# Altium PCB PJ1301-001-A1.PcbDoc (part 4 of 4)
Units mm, origin at the board's own origin, x right, y up, seen from the top; angles counter-clockwise.
Board outline 163.83 x 187.81 mm, 4 copper layers (Top Layer, GND, POWER, Bottom Layer); 436 components, 348 nets, 1620 pads, 1368 vias.
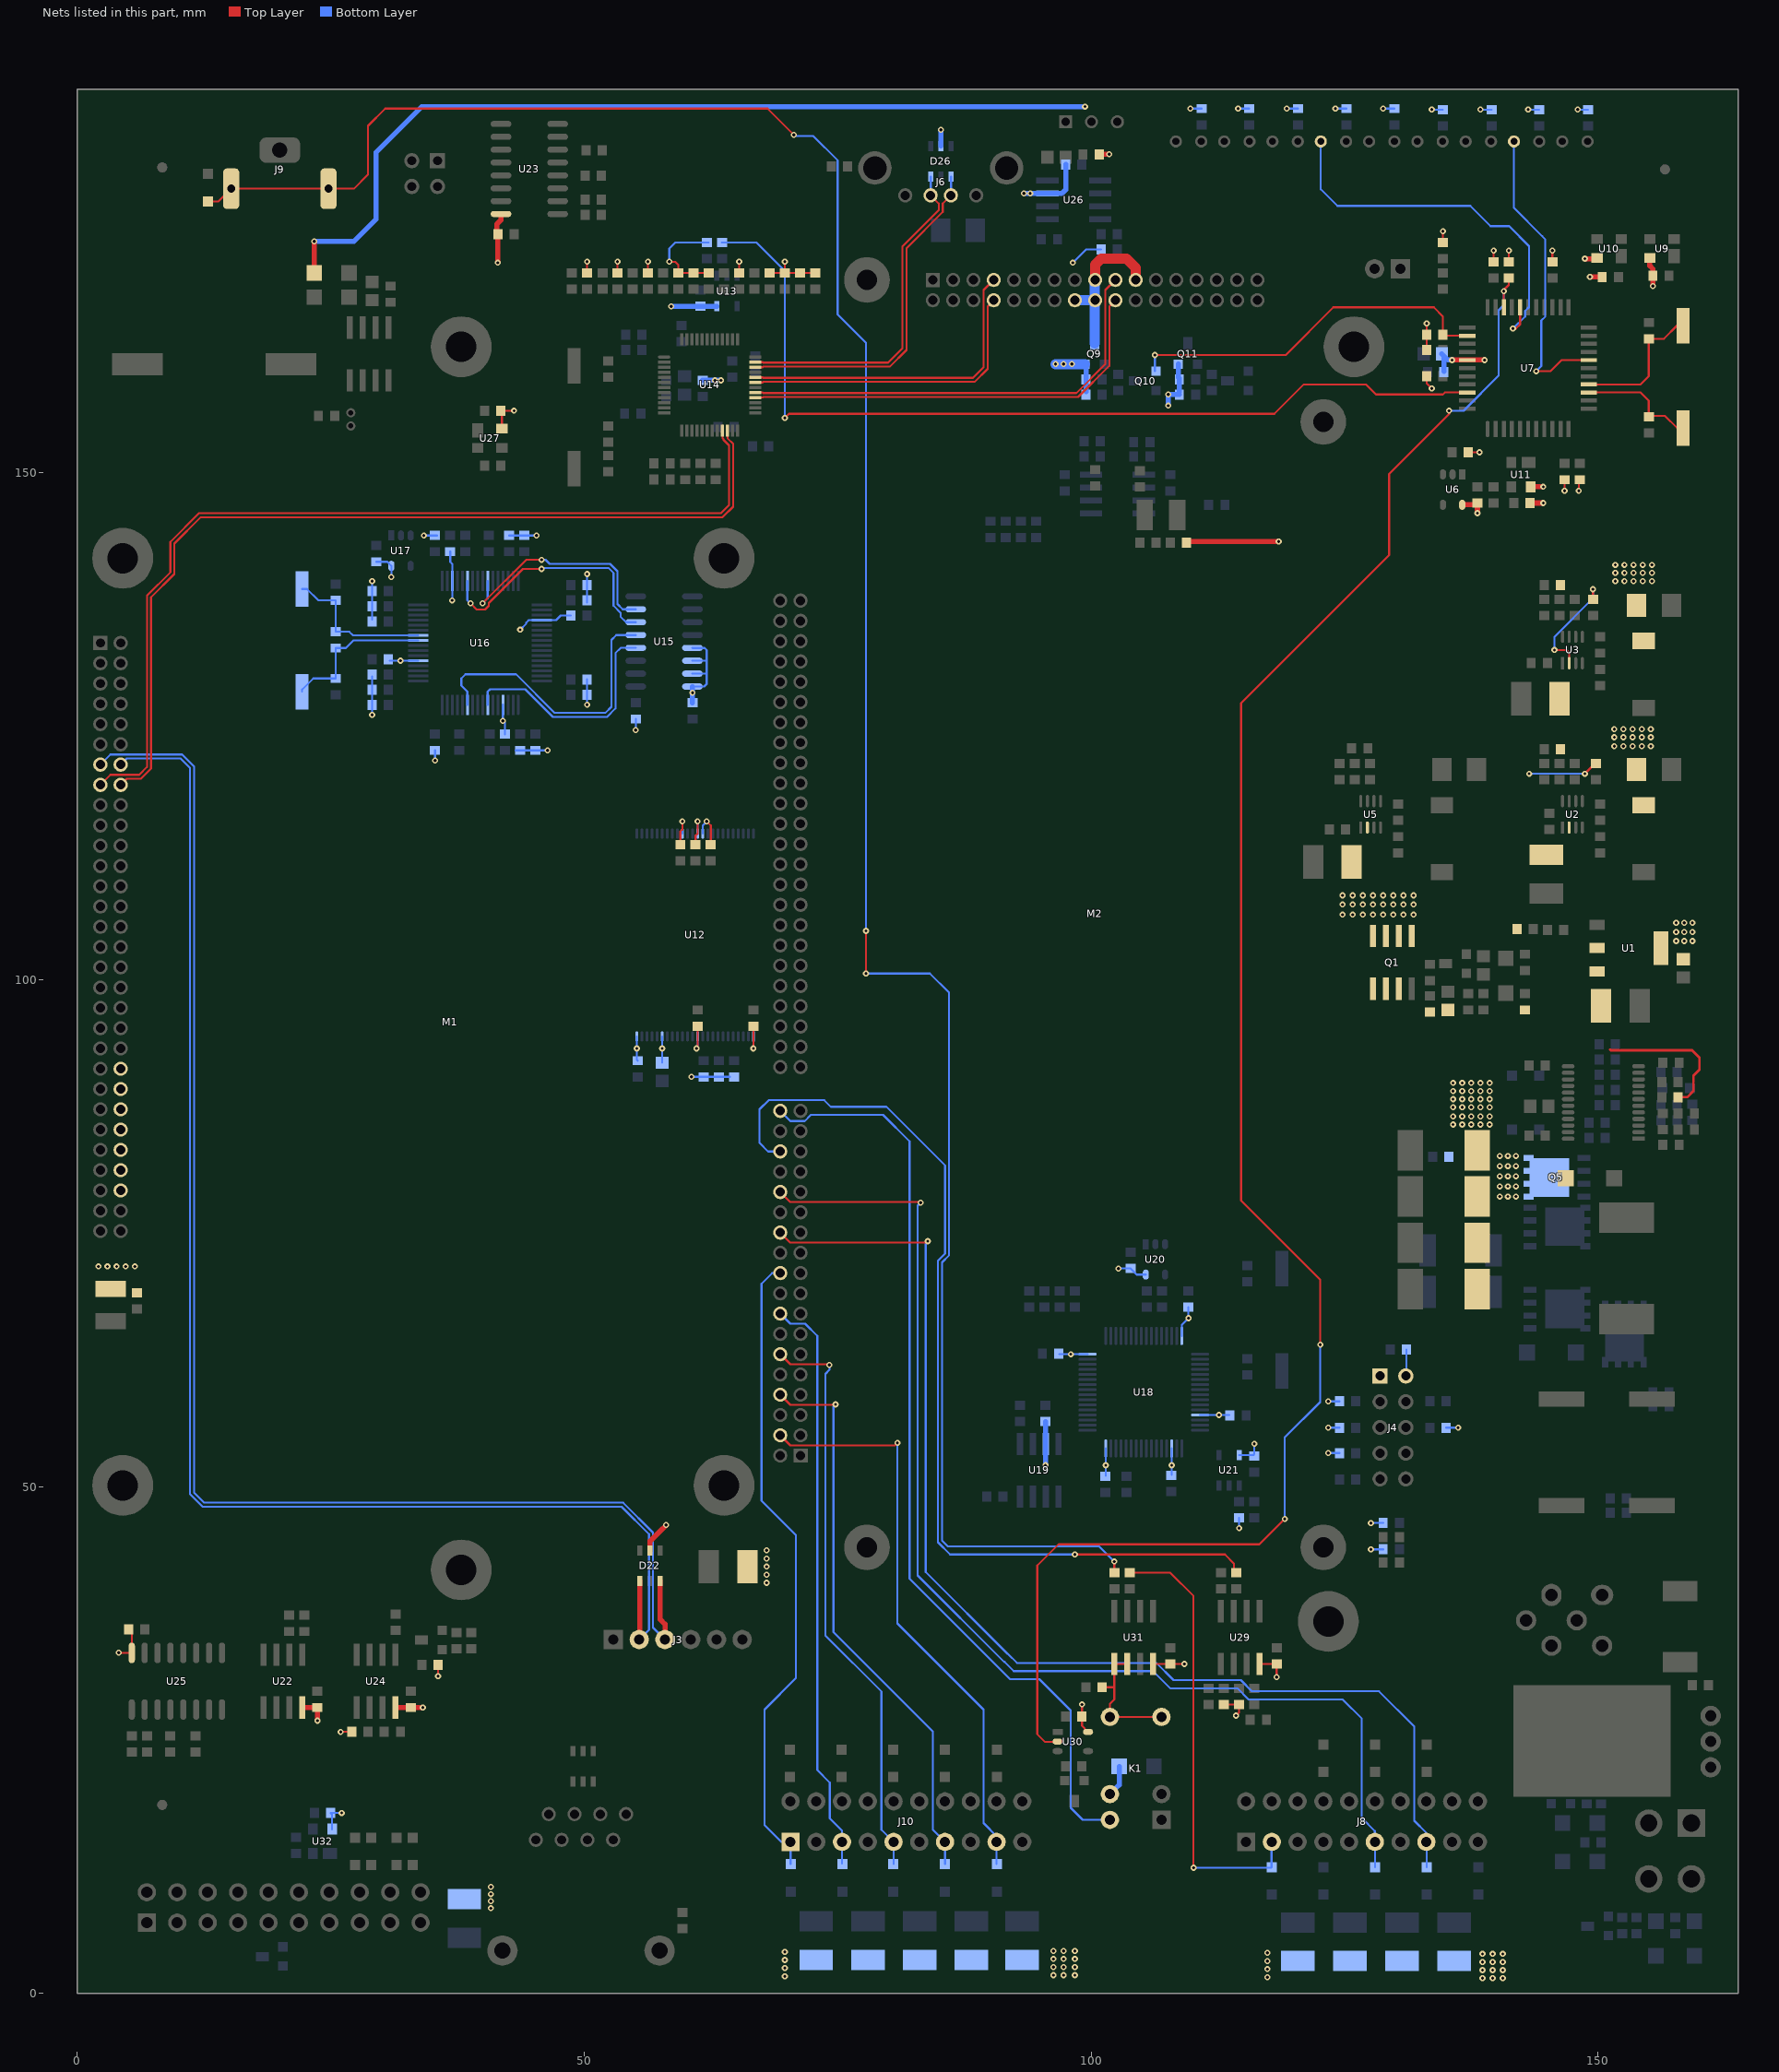
[diagram p6: the nets of this part, all layers, seen from the top]

## Via types
v1: diameter 0.6, hole 0.3, Top Layer to Bottom Layer, tented both sides, 1367 vias
v2: diameter 0.6, hole 0.3, Top Layer to Bottom Layer, 1 vias

## Nets (pads, with @x,y where several pads share a name; then routed paths per layer and width w, separated by ;. In a path a pad name is that pad's centre, name@x,y a point inside that pad or via, vN(x,y) a via of type N, cw(c..) or ccw(c..) an arc to the next point about the centre after c; other vN are vias at no path point) (continued)
UARTA-CS: U15.4 U16.7 | length 23.2
  Bottom Layer w0.2: U16.7@40.5,127.1 40.5,128.4 40.734,128.634 44.2,128.634 46.934,125.9 52.266,125.9 53.1,126.734 53.1,132.2 53.61,132.71 U15.4@55.1,132.71
UARTB-CS: U15.5 U16.11 | length 28.8
  Bottom Layer w0.2: U16.11@38.5,127.1 38.5,128.4 37.9,129 37.9,129.7 38.3,130.1 43.3,130.1 47.1,126.3 52.1,126.3 52.7,126.9 52.7,133.5 53.18,133.98 U15.5@55.1,133.98
UARTC-CS: U15.6 U16.38 | length 25.1
  Top Layer w0.2: v1(38.8,137.1) 39.4,136.5 40.249,136.5 40.6,136.851 40.6,137.134 43.966,140.5 v1(45.8,140.5)
  Bottom Layer w0.2: U16.38@38.5,139.3 38.5,137.4 v1(38.8,137.1) ; v1(45.8,140.5) 45.9,140.6 52.4,140.6 52.9,140.1 52.9,136.874 53.6,136.174 53.6,135.8 54.15,135.25 U15.6@55.1,135.25
UARTD-CS: U15.7 U16.42 | length 23.2
  Top Layer w0.2: v1(40,137.1) 44.3,141.4 v1(45.8,141.4)
  Bottom Layer w0.2: v1(40,137.1) 40.5,137.6 U16.42@40.5,139.3 ; v1(45.8,141.4) 46.2,141.4 46.6,141 52.566,141 53.3,140.266 53.3,137.04 53.82,136.52 U15.7@55.1,136.52
USB0_N: M1.A15 U14.21 | length 92.7
  Top Layer w0.2: M1.A15@2.3,119.2 3.3,120.2 6.134,120.2 6.9,120.966 6.9,137.866 9.2,140.166 9.2,143.166 12.034,146 63.5,146 64.3,146.8 64.3,152.676 63.75,153.226 63.75,153.291 63.65,153.391 U14.21@63.65,154.15
USB0_P: M1.A16 U14.22 | length 91.2
  Top Layer w0.2: M1.A16@4.3,119.2 4.9,119.8 6.3,119.8 7.3,120.8 7.3,137.7 9.6,140 9.6,143 12.2,145.6 63.666,145.6 64.7,146.634 64.7,152.841 64.15,153.391 U14.22@64.15,154.15
USB1_N: D22.3 J3.3 M1.A13 | length 145.7
  Top Layer w0.5: D22.3@57.5,40.7 57.5,36.9 57.98,36.42 J3.3@57.98,34.9
  Bottom Layer w0.2: M1.A13@2.3,121.2 3.3,122.2 10.366,122.2 11.55,121.016 11.55,49.4 12.55,48.4 53.866,48.4 56.8,45.466 56.8,36.08 J3.3@57.98,34.9
USB1_P: D22.1 J3.2 M1.A14 | length 142.5
  Top Layer w0.5: J3.2@55.5,34.96 D22.1@55.5,40.7
  Bottom Layer w0.2: M1.A14@4.3,121.2 4.9,121.8 10.2,121.8 11.15,120.85 11.15,49.4 11.15,49.234 12.384,48 53.7,48 56.4,45.3 56.4,35.86 J3.2@55.44,34.9
USB2_N: M2.20 U14.28 | length 42.9
  Top Layer w0.2: U14.28@66.9,157.4 67.63,157.4 67.68,157.45 98.716,157.45 101.8,160.534 101.8,166.4 M2.20@102.4,167
USB2_P: M2.19 U14.29 | length 44.4
  Top Layer w0.2: U14.29@66.9,157.9 67.63,157.9 67.68,157.85 98.55,157.85 101.4,160.7 101.4,168 M2.19@102.4,169
USB3_N: M2.8 U14.31 | length 30.5
  Top Layer w0.2: U14.31@66.9,158.9 67.63,158.9 67.68,158.95 88.516,158.95 89.8,160.234 89.8,166.4 M2.8@90.4,167
USB3_P: M2.7 U14.32 | length 32
  Top Layer w0.2: U14.32@66.9,159.4 67.63,159.4 67.68,159.35 88.35,159.35 89.4,160.4 89.4,168 M2.7@90.4,169
USB4_N: D26.1 J6.2 U14.34 | length 34.5
  Top Layer w0.2: U14.34@66.9,160.4 67.63,160.4 67.68,160.45 80.15,160.45 81.8,162.1 81.8,172.134 85.379,175.713 85.379,176.545 J6.2@86.179,177.345
  Bottom Layer w0.2: J6.2@86.2,177.366 D26.1@86.2,179.2
USB4_P: D26.3 J6.3 U14.35 | length 33.8
  Top Layer w0.2: U14.35@66.9,160.9 67.63,160.9 67.68,160.85 79.984,160.85 81.4,162.266 81.4,172.3 84.979,175.879 84.979,176.545 J6.3@84.179,177.345
  Bottom Layer w0.2: J6.3@84.2,177.366 D26.3@84.2,179.2
USBHUB-RST: R68.1 U7.42 | length 91
  Top Layer w0.2: v1(69.8,155.4) 70.2,155.8 118.069,155.8 120.969,158.7 127.1,158.7 128.1,157.7 134.7,157.7 134.9,157.9 U7.42@137.1,157.9
  Bottom Layer w0.2: R68.1@63.6,172.7 67,172.7 69.8,169.9 v1(69.8,155.4)
V3.3: C16.1 C57.2 C58.2 C59.2 C60.2 C61.2 C62.2 C63.2 C78.1 C79.1 C80.2 C81.2 C82.2 C83.2 C84.1 C87.1 C88.1 C89.1 C91.2 C92.2 C93.2 C94.2 C95.2 C96.2 C97.1 C101.1 C107.1 C112.2 C122.1 C123.2 C124.1 C125.1 J4.1 J4.2 L1.2 L5.2 Q9.2 Q11.2 R14.1 R53.2 R54.2 R55.2 R56.1 R63.2 R64.2 R67.1 R69.2 R70.2 R71.2 R72.2 R73.2 R74.2 R75.2 R76.2 R77.2 R78.2 R79.2 R80.2 R81.2 R82.2 R83.2 R84.2 R85.2 R86.2 R91.2 R92.2 R93.2 R95.2 R98.2 R101.1 R102.1 R110.2 R111.2 R112.2 R113.2 R119.1 R129.2 R130.2 R152.2 R153.2 R154.2 R155.2 R158.2 U12.1 U12.12 U12.19 U12.24 U12.34 U12.37 U12.38 U13.5 U15.13 U15.14 U15.15 U15.16 U16.4 U16.21 U16.35 U16.52 U17.5 U18.13 U18.19 U18.32 U18.48 U18.64 U20.5 U21.5 U23.16 U25.16 U27.4 U29.4 U30.5 U31.4 U32.4 | length 174.9
  Top Layer w0.2: v1(4.1,33.6) 4.112,33.588 U25.16@5.4,33.588 5.4,35.6 C107.1@5.1,35.9 ; U27.4@41.9,154.35 C112.2@41.9,156 ; C112.2@41.9,156.1 v1(43.1,156.1) ; R152.2@50.3,169.7 v1(50.3,170.8) ; R153.2@53.3,169.7 v1(53.3,170.8) ; R154.2@56.3,169.7 v1(56.3,170.8) ; v1@58.388,170.788 59.012,170.788 59.3,170.5 R155.2@59.3,169.7 R72.2@62.3,169.7 ; C58.2@59.5,113.3 59.5,114.6 59.7,114.8 v1(59.7,115.6) ; C59.2@61,113.3 61,114.2 61.2,114.4 v1(61.2,115.6) ; v1(61.1,93.2) 61.2,93.3 C62.2@61.2,95.4 ; v1(62.1,115.6) 62.5,115.2 C60.2@62.5,113.3 ; R71.2@65.3,169.7 v1(65.3,170.8) ; v1(66.7,93.2) C63.2@66.7,95.4 ; R70.2@68.3,169.7 R64.2@69.8,169.7 ; v1(69.8,170.8) R64.2@69.8,169.7 ; R63.2@72.8,169.7 R69.2@71.3,169.7 R64.2@69.8,169.7 ; v1(99.1,28.5) C123.2@99.1,27.3 99.1,26.4 U30.5@99.7,25.8 ; U31.4@106.105,32.5 v1(109.2,32.5) ; R130.2@113.1,28.5 R129.2@114.5,28.5 ; v1(114.3,27.4) 114.6,27.7 R129.2@114.6,28.5 ; U29.4@116.605,32.5 C122.1@118.3,32.5 v1(118.3,31.2)
  Top Layer w0.5: v1(41.5,170.7) C101.1@41.5,173.5 41.4,173.6 41.4,174.5 41.812,174.912 U23.16@41.812,175.5
  Bottom Layer w0.2: U32.4@25.15,16.2 25.15,17.65 C125.1@25,17.8 v1(26.1,17.8) ; v1(29.1,126.1) R80.2@29.1,128.6 R81.2@29.1,129.9 ; R85.2@29.1,135.5 R84.2@29.1,136.8 v1(29.1,139.3) ; C84.1@29.5,141.2 30.6,141.2 U17.5@31,140.8 v1(31,139.7) ; C80.2@30.85,131.45 U16.21@33.65,131.45 ; v1@34.4,143.8 R82.2@35.5,143.8 ; v1(35.3,121.6) R78.2@35.3,122.6 ; C83.2@36.8,142.2 36.8,141.2 37,141 U16.35@37,139.3 v1(37,137.4) ; U16.4@42,127.1 v1(42,125.5) 42.2,125.3 C81.2@42.2,124.2 ; R86.2@42.6,143.8 v1(45.3,143.8) ; R74.2@43.233,122.6 45.8,122.6 v1(46.4,122.6) ; v1(43.7,134.5) 44.3,135.1 44.3,135.2 44.55,135.45 U16.52@45.85,135.45 47.25,135.45 47.7,135.9 C82.2@48.7,135.9 ; v1(50.3,127.1) R77.2@50.3,129.6 ; R93.2@50.3,137.2 50.3,138.5 v1@50.3,139.8 ; v1(55.1,124.6) R73.2@55.1,125.7 ; U12.24@55.2,94.4 v1(55.2,93.2) 55.2,92.1 C61.2@55.3,92 ; C57.2@57.7,91.8 U12.19@57.7,94.4 ; v1(58.4,170.8) 58.4,172.1 59,172.7 R67.1@62.3,172.7 ; U12.34@59.7,114.4 v1(59.7,115.6) ; v1(60.6,90.4) R53.2@61.8,90.4 R55.2@64.4,90.4 ; U15.16@60.688,128.9 61.84,128.9 62.07,129.13 ; U15.15@60.688,130.17 62.07,130.17 62.1,130.2 ; U15.14@60.688,131.44 62.06,131.44 ; U15.13@60.688,132.71 60.698,132.7 61.9,132.7 62.1,132.5 62.1,130.2 ; v1(61.1,93.2) 61.2,93.3 U12.12@61.2,94.4 ; U12.37@61.2,114.4 v1(61.2,115.6) ; U12.38@61.7,114.4 61.7,115.2 v1(62.1,115.6) ; 62.1,129.16 62.1,130.2 ; v1(66.7,93.2) U12.1@66.7,94.4 ; C95.2@96.85,63.05 U18.48@99.65,63.05 ; v1(98.2,170.7) 99.5,172 R158.2@101,172 ; C94.2@101.45,51.05 U18.32@101.45,53.75 ; v1(102.7,71.5) C89.1@103.9,71.5 104.5,70.9 U20.5@105.4,70.9 ; C93.2@107.95,51.15 U18.19@107.95,53.75 ; U18.64@108.95,64.85 108.95,65.95 v1(109.6,66.6) C96.2@109.6,67.7 ; U18.13@110.75,57.05 C92.2@113.65,57.05 ; v1(114.6,45.9) R119.1@114.6,46.9 ; U21.5@114.6,53.1 116,53.1 116.1,53.2 v1(116.1,54.2) ; v1(123.4,53.3) R112.2@124.5,53.3 ; v1(123.4,55.8) R111.2@124.5,55.8 ; v1(123.4,58.4) R110.2@124.5,58.4 ; v1(127.6,43.8) R102.1@128.8,43.8 ; v1(127.6,46.4) R101.1@128.8,46.4 ; J4.2@131.1,60.96 C91.2@131.1,63.5 ; R113.2@135,55.8 v1(136.2,55.8)
  Bottom Layer w0.5: v1(58.6,166.4) C78.1@61.5,166.4 U13.5@63.1,166.4 ; U15.16@60.688,128.9 60.7,128.888 v1(60.7,128.3) C79.1@60.7,127.3 ; L5.2@61.7,159.1 v1(63.5,159.1) ; Q9.2@99.4,160.7 99.5,160.6 C87.1@99.5,158 ; v1(107.6,156.6) v1(107.6,157.7) C88.1@108.7,157.7 ; Q11.2@108.595,160.7 108.595,159.405 108.7,159.3 R98.2@108.7,159.2 C88.1@108.7,158
  Bottom Layer w1: v1(96.5,160.7) Q9.2@99.4,160.7
  other v1: 101.45,52.1 107.95,52.1 112.6,57.05 98,63.05 57.7,93.2 151.6,123 152.5,123 153.4,123 154.3,123 155.2,123 151.6,123.9 152.5,123.9 153.4,123.9 154.3,123.9 155.2,123.9 151.6,124.7 152.5,124.7 153.4,124.7 154.3,124.7 155.2,124.7 31.9,131.45 50.3,140 34.2,143.8 62.9,159.1 97.3,160.7 98.1,160.7
V3.3-MCU: C10.2 C44.1 C47.2 C48.2 C49.2 C50.2 C51.2 D27.2 R4.1 R39.1 R40.1 R41.1 R42.1 R43.1 R44.1 R45.1 R46.1 R47.1 R48.1 R49.1 R50.1 R51.1 R52.1 R97.2 R100.2 R106.1 R134.1 R139.1 U1.2 U1.4 U6.5 U7.38 U9.4 U10.4 U11.4 | length 127.2
  Top Layer w0.2: R139.1@133.1,159.5 133.1,158.8 v1(133.6,158.3) ; R100.2@133.1,162.2 R97.2@133.1,163.6 v1(133.1,164.7) ; R51.1@134.7,172.7 v1(134.7,173.8) ; R39.1@137.2,152 v1(138.3,152) ; R106.1@139.7,170.8 v1(139.7,171.9) ; R134.1@141.2,170.8 v1(141.2,171.9) ; R49.1@145.5,170.8 v1(145.5,171.9) ; v1(146.7,148.2) R50.1@146.7,149.3 ; v1(148.1,148.2) R4.1@148.1,149.3
  Top Layer w0.5: D27.2@23.4,169.5 v1(23.4,172.8) ; R52.1@100.7,181.4 v1(101.8,181.4) ; v1(135.6,161.1) U7.38@137.1,161.1 v1(138.8,161.1) ; v1(148.7,171.1) U10.4@149.85,171.1 ; v1(149.2,169.3) C50.2@150.4,169.3 ; U9.4@155.1,171.15 155.1,170.4 155.4,170.1 C48.2@155.4,169.4 v1(155.4,168.4)
  Top Layer w0.508: U6.5@136.6,146.827 C44.1@137.927,146.827 ; v1(138.1,146) C44.1@138.1,147 ; C51.2@143.3,147 v1(144.6,147) ; U11.4@143.35,148.6 v1(144.6,148.6)
  Bottom Layer w0.2: v1(109.8,185.9) R45.1@110.9,185.9 ; v1(114.5,185.9) R44.1@115.6,185.9 ; v1(119.3,185.9) R47.1@120.4,185.9 ; v1(124.1,185.9) R48.1@125.2,185.9 ; v1(128.8,185.9) R43.1@129.9,185.9 ; v1(133.6,185.8) R42.1@134.7,185.8 ; v1(138.4,185.8) R41.1@139.5,185.8 ; v1(143.1,185.8) R40.1@144.2,185.8 ; v1(148,185.8) R46.1@149,185.8
  Bottom Layer w0.5: v1(23.4,172.8) 27.3,172.8 29.5,175 29.5,181.6 34,186.1 v1(99.4,186.1) ; C49.2@134.6,161.7 C49.2@134.8,161.5 ; C47.2@134.8,160 C49.2@134.8,161.5 ; v1(135.6,161.1) 135.2,161.1 C49.2@134.8,161.5
  other v1: 157.7,103.8 158.5,103.8 159.3,103.8 157.7,104.7 158.5,104.7 159.3,104.7 157.7,105.6 158.5,105.6 159.3,105.6
V5: C26.1 C55.2 C56.2 C90.2 C100.2 C106.1 C113.1 D22.5 D26.5 D40.1 F2.2 K1.9 L2.2 M1.A44 M1.A46 M1.A48 M1.A50 M1.A52 M1.A54 M1.A56 R20.1 R123.1 R126.2 R140.2 U19.3 U22.8 U24.8 U26.7 | length 35.9
  Top Layer w0.2: v1(26,25.8) R126.2@27.1,25.8 ; v1(35.6,31.3) R123.1@35.6,32.4
  Top Layer w0.5: U22.8@22.205,28.2 C100.2@23.7,28.2 v1(23.7,26.9) ; U24.8@31.405,28.2 v1(34.1,28.2) ; D22.5@56.5,43.7 56.5,44.6 57.5,45.6 v1(58.1,46.2) ; R140.2@109.3,143.2 v1(118.5,143.2)
  Bottom Layer w0.5: D26.5@85.2,182.2 v1(85.2,183.8) ; v1(93.365,177.535) U26.7@95.7,177.535 97.135,177.535 97.5,177.9 C113.1@97.5,180.4 ; v1(95.5,52.1) C90.2@95.5,56.4 ; K1.9@101.86,19.66 102.771,20.571 D40.1@102.771,22.4
  other v1: 68,40.5 68,41.3 68,42.1 68,42.9 68,43.7 2.1,71.7 3,71.7 3.9,71.7 4.8,71.7 5.7,71.7 151.7,139.3 152.6,139.3 153.5,139.3 154.4,139.3 155.3,139.3 151.7,140.1 152.6,140.1 153.5,140.1 154.4,140.1 155.3,140.1 151.7,140.9 152.6,140.9 153.5,140.9 154.4,140.9 155.3,140.9 94,177.535
V12: C15.2 C25.2 C37.2 F3.1 F4.1 F5.1 F6.1 F7.1 F9.1 F10.1 F11.1 F12.1 F13.1 Q1.5 Q1.6 Q1.7 Q1.8 R2.2 R12.2 R18.2 U2.2 U3.2 U5.2 | length 18.1
  Top Layer w0.2: v1(145.7,132.5) 146.9,132.5 147.15,132.25 U3.2@147.15,131.2 ; v1@148.6,120.3 v1(148.7,120.3) R12.2@149.7,121.3 ; R18.2@149.5,137.5 v1(149.5,138.5)
  Bottom Layer w0.2: v2(143.2,120.3) v1@148.6,120.3 ; v1(145.7,132.5) 145.7,133.8 149.5,137.6 v1(149.5,138.5)
  other v1: 138.6,1.5 139.6,1.5 140.6,1.5 117.4,1.6 69.8,1.7 96.3,1.8 97.3,1.8 98.4,1.8 138.6,2.3 139.6,2.3 140.6,2.3 117.4,2.4 69.8,2.5 96.3,2.6 97.3,2.6 98.4,2.6 138.6,3.1 139.6,3.1 140.6,3.1 117.4,3.2 69.8,3.3 96.3,3.4 97.3,3.4 98.4,3.4 138.6,3.9 139.6,3.9 140.6,3.9 117.4,4 69.8,4.1 96.3,4.2 97.3,4.2 98.4,4.2 40.8,8.4 40.8,9.1 40.8,9.8 40.8,10.5 124.8,106.4 125.8,106.4 126.8,106.4 127.8,106.4 128.8,106.4 129.8,106.4 130.8,106.4 131.8,106.4 124.8,107.4 125.8,107.4 126.8,107.4 127.8,107.4 128.8,107.4 129.8,107.4 130.8,107.4 131.8,107.4 124.8,108.3 125.8,108.3 126.8,108.3 127.8,108.3 128.8,108.3 129.8,108.3 130.8,108.3 131.8,108.3
V12-MP: C2.2 C9.2 C19.1 C20.1 C21.1 C22.1 C23.2 D9.2 Q1.1 Q1.2 Q1.3 Q5. Q5.5 Q5.6 Q5.7 Q5.8 R1.2 R26.1 R156.1 U1.3 | length 14.4
  Top Layer w0.254: 151.2,93.1 151.273,93.027 159.273,93.027 160,92.3 160,91.1 159.4,90.5 159.4,89 158.8,88.4 R26.1@157.9,88.4
  other v1: 140.3,78.6 141.1,78.6 141.9,78.6 140.3,79.6 141.1,79.6 141.9,79.6 140.3,80.6 141.1,80.6 141.9,80.6 140.3,81.6 141.1,81.6 141.9,81.6 140.3,82.6 141.1,82.6 141.9,82.6 135.7,85.7 136.6,85.7 137.5,85.7 138.4,85.7 139.3,85.7 135.7,86.5 136.6,86.5 137.5,86.5 138.4,86.5 139.3,86.5 135.7,87.4 136.6,87.4 137.5,87.4 138.4,87.4 139.3,87.4 135.7,88.2 136.6,88.2 137.5,88.2 138.4,88.2 139.3,88.2 135.7,89 136.6,89 137.5,89 138.4,89 139.3,89 135.7,89.8 136.6,89.8 137.5,89.8 138.4,89.8 139.3,89.8
VIDEO-OUT: K1.5 K1.6 R138.1 U31.1 U31.2 | length 12.9
  Top Layer w0.2: R138.1@101.1,30.2 102.295,30.2 ; U31.2@103.565,32.5 U31.1@102.295,32.5 102.295,30.2 ; K1.5@106.94,27.28 K1.6@101.86,27.28 101.86,28.56 102.295,28.995 102.295,30.2
VIDEO-SW: R134.2 U7.31 U30.2 | length 185.7
  Top Layer w0.2: U30.2@96.7,24.85 96.65,24.8 95.475,24.8 94.7,25.575 94.7,42.2 96.8,44.3 116.6,44.3 v1(119.1,46.8) ; v1(122.6,64) 122.6,70.4 114.8,78.2 114.8,127.269 129.4,141.869 129.4,149.869 135.3,155.769 v1(135.3,156.1) ; U7.31@140.7,166.3 140.7,168 141.2,168.5 R134.2@141.2,169.2
  Bottom Layer w0.2: v1(119.1,46.8) 119.1,54.834 122.6,58.334 v1(122.6,64) ; v1(135.3,156.1) 136.731,156.1 140.2,159.569 140.2,166 140.7,166.5 v1(140.7,167.9)
VIN1: M1.C32 R132.2 | length 95.5
  Top Layer w0.2: v1(98.4,43.3) 113.2,43.3 114.1,42.4 R132.2@114.1,41.5
  Bottom Layer w0.2: M1.C32@69.352,83.049 68.151,83.049 67.3,83.9 67.3,87.2 68.2,88.1 73.683,88.1 74.334,87.449 79.817,87.449 85.6,81.666 85.6,72.969 84.9,72.269 84.9,44.5 86.1,43.3 v1(98.4,43.3)
VIN2: D37.2 J8.11 M1.C28 | length 116
  Top Layer w0.2: M1.C28@69.352,79.049 70.352,78.049 83.151,78.049 v1(83.2,78)
  Bottom Layer w0.2: v1(83.2,78) 82.9,77.7 82.9,41.234 91.434,32.7 91.466,32.7 92.366,31.8 106.103,31.8 107.803,30.1 114.437,30.1 115.537,29 124.8,29 126.7,27.1 126.7,17.3 127.987,16.013 J8.11@127.987,14.951 ; D37.2@128,12.45 J8.11@128,14.939
VIN3: D38.2 J8.15 M1.C24 | length 116.6
  Top Layer w0.2: M1.C24@69.352,75.049 70.352,74.049 83.749,74.049 v1(83.9,74.2)
  Bottom Layer w0.2: v1(83.9,74.2) 83.7,74 83.7,41.569 91.769,33.5 91.797,33.5 92.697,32.6 106.434,32.6 108.134,30.9 114.769,30.9 115.869,29.8 128.4,29.8 131.867,26.333 131.867,17.033 133.067,15.833 J8.15@133.067,14.951 ; D38.2@133.1,12.45 J8.15@133.1,14.919
VIN4: D39.2 J10.1 M1.C20 | length 63.8
  Bottom Layer w0.2: M1.C20@69.352,71.049 68.549,71.049 67.5,70 67.5,48.6 70.9,45.2 70.9,31.1 67.8,28 67.8,16.6 69.449,14.951 J10.1@70.361,14.951 D39.2@70.361,12.789
VIN5: D46.2 J10.5 M1.C16 | length 57.6
  Bottom Layer w0.2: M1.C16@69.352,67.049 70.352,66.049 71.8,66.049 73,64.849 73,22.041 74.241,20.8 74.241,17.259 75.441,16.059 J10.5@75.441,14.951 D46.2@75.441,12.809
VIN6: D47.2 J10.9 M1.C12 | length 57.5
  Top Layer w0.2: M1.C12@69.352,63.049 70.352,62.049 74.151,62.049 v1(74.2,62)
  Bottom Layer w0.2: v1(74.2,62) 74.2,61.5 73.8,61.1 73.8,35.3 79.321,29.779 79.321,16.151 J10.9@80.521,14.951 D47.2@80.521,12.771
VIN7: D48.2 J10.13 M1.C8 | length 55.9
  Top Layer w0.2: M1.C8@69.352,59.049 70.352,58.049 74.749,58.049 v1(74.8,58.1)
  Bottom Layer w0.2: v1(74.8,58.1) 74.6,57.9 74.6,35.631 84.4,25.831 84.4,16.152 J10.13@85.601,14.951 D48.2@85.601,12.751
VIN8: D49.2 J10.17 M1.C4 | length 57.6
  Top Layer w0.2: M1.C4@69.352,55.049 70.352,54.049 80.649,54.049 v1(80.9,54.3)
  Bottom Layer w0.2: v1(80.9,54.3) 80.9,36.5 89.4,28 89.4,16.8 90.681,15.519 J10.17@90.681,14.951 D49.2@90.681,12.769
VLOSS-LED: D21.2 U7.29 | length 39
  Top Layer w0.2: v1(141.6,164.2) 141.9,164.2 142.3,164.6 U7.29@142.3,166.3
  Bottom Layer w0.2: D21.2@122.653,182.661 122.653,177.947 124.3,176.3 137.403,176.3 139.403,174.3 141.237,174.3 143.2,172.337 143.2,166.331 142.8,165.931 142.8,165.4 v1(141.6,164.2)
VO1: D35.2 J8.3 R137.2 | length 44.4
  Top Layer w0.2: R137.2@103.6,41.5 107.8,41.5 110.1,39.2 v1(110.1,12.4)
  Bottom Layer w0.2: v1(110.1,12.4) 117.75,12.4 D35.2@117.8,12.45 J8.3@117.8,14.924
VO2: D45.2 J9.1 R136.2 | length 234.4
  Top Layer w0.2: D45.2@12.9,176.75 13.95,176.75 J9.1@15.2,178 J9.1@24.8,178 27.3,178 28.7,179.4 28.7,184.2 30.4,185.9 68.1,185.9 v1(70.7,183.3) ; v1(77.8,100.6) v1(77.8,104.8) ; R136.2@102.3,41.5 v1(102.3,42.6)
  Bottom Layer w0.2: v1(70.7,183.3) 70.8,183.2 72.6,183.2 75,180.8 75,165.6 77.8,162.8 v1(77.8,104.8) ; v1(77.8,100.6) 84.1,100.6 86,98.7 86,72.803 85.3,72.103 85.3,44.666 85.866,44.1 100.8,44.1 v1(102.3,42.6)
VOUT: K1.10 M1.C36 | length 92.9
  Bottom Layer w0.2: M1.C36@69.352,87.049 70.352,86.049 71.766,86.049 72.352,86.635 72.352,86.649 79.485,86.649 82.1,84.034 82.1,40.903 92.003,31 94.9,31 98,27.9 98,18.3 99.18,17.12 K1.10@101.86,17.12
WIFI-LED: D13.2 U7.18 | length 30
  Top Layer w0.2: v1(143.9,160) 145.3,160 146.4,161.1 U7.18@149.1,161.1
  Bottom Layer w0.2: D13.2@141.704,182.661 141.704,176.097 144.5,173.3 144.8,173 144.8,165.4 144.4,165 144.4,160.5 v1(143.9,160)
WIFI-PWR: M2.16 M2.17 M2.18 M2.21 Q9.3 | length 15.5
  Top Layer w1: M2.17@100.4,169 100.4,170.5 101,171.1 103.5,171.1 104.4,170.2 M2.21@104.4,169
  Bottom Layer w1: M2.16@98.4,167 M2.18@100.34,167 ; Q9.3@100.34,162.732 M2.18@100.34,167 ; M2.17@100.34,168.94 M2.18@100.34,167 ; M2.18@100.4,167 M2.18@100.34,167
WIFI-PWR-CTRL: Q10.2 R97.1 U7.35 | length 36.6
  Top Layer w0.2: v1(106.3,161.6) 119.2,161.6 123.9,166.3 133.8,166.3 134.7,165.4 R97.1@134.7,163.4 ; R97.1@134.8,163.5 U7.35@137.1,163.5
  Bottom Layer w0.2: Q10.2@106.3,160 v1(106.3,161.6)
X1: C52.2 U7.15 Y1.2 | length 13.9
  Top Layer w0.2: U7.15@149.1,158.7 154.2,158.7 155,159.5 C52.2@155,163.2 156.5,163.2 157.8,164.5 Y1.2@158.4,164.5
X2: C54.2 U7.14 Y1.1 | length 11.8
  Top Layer w0.2: U7.14@149.1,157.9 154.2,157.9 155,157.1 C54.2@155,155.5 155.1,155.6 156.6,155.6 157.821,154.379 Y1.1@158.4,154.379
XT1: C85.2 R94.2 U16.25 Y3.2 | length 15.4
  Bottom Layer w0.2: Y3.2@22.2,128.4 22.2,128.6 23.3,129.7 C85.2@25.5,129.7 R94.2@25.5,132.7 26.5,132.7 27.25,133.45 U16.25@33.65,133.45
XT2: C86.2 R94.1 U16.26 Y3.1 | length 15.2
  Bottom Layer w0.2: Y3.1@22.2,138.521 22.679,138.521 23.8,137.4 C86.2@25.5,137.4 R94.1@25.5,134.3 26.85,134.3 27.2,133.95 U16.26@33.65,133.95
pads on no net: D22.4 D22.6 D26.4 D26.6 D29.2 D29.5 J4.8 J7.4 J7.5 J7.7 J7.8 M1. M1.A3 M1.A4 M1.A5 M1.A6 M1.A7 M1.A8 M1.A9 M1.A10 M1.A19 M1.A22 M1.A25 M1.A27 M1.A28 M1.A29 M1.A30 M1.A40 M1.A42 M1.B4 M1.B5 M1.B6 M1.B7 M1.B8 M1.B9 M1.B10 M1.B11 M1.B12 M1.B18 M1.B23 M2. M2.24 TP17. TP18. TP19. TP20. TP21. TP22. U4.1 U6.1 U7.1 U7.2 U7.3 U7.5 U7.6 U7.7 U7.17 U7.28 U7.39 U7.41 U7.43 U7.44 U12.3 U12.4 U12.5 U12.6 U12.10 U12.11 U12.14 U12.15 U12.20 U12.21 U12.22 U12.26 U12.27 U12.28 U12.33 U12.35 U12.39 U12.40 U12.45 U12.46 U12.47 U14.25 U14.26 U15.9 U15.10 U15.11 U15.12 U16.3 U16.5 U16.13 U16.15 U16.34 U16.36 U16.44 U16.46 U17.1 U18.1 U18.2 U18.3 U18.4 U18.8 U18.9 U18.10 U18.11 U18.14 U18.15 U18.20 U18.21 U18.24 U18.25 U18.26 U18.27 U18.29 U18.30 U18.33 U18.34 U18.35 U18.36 U18.37 U18.38 U18.39 U18.40 U18.41 U18.51 U18.52 U18.53 U18.54 U18.57 U18.58 U18.59 U18.61 U18.62 U19.5 U20.1 U23.7 U23.8 U23.9 U23.10 U26.2 U26.3 U26.8 U28.3 U28.7 U29.3 U29.6 U30.1 U31.3 U31.6
copper on no net: | length 0

## Polygon pours and split planes (outlines as drawn)
AGND on Bottom Layer "Bottom Layer-GND" (solid, remove dead copper, pour order 80): 89.2,154 88.9,153.7 88.9,141.7 89.2,141.4 111.9,141.4 112.2,141.7 112.2,153.7 111.9,154 89.2,154
V12 on Bottom Layer "Bottom Layer-GND" (solid, pour order 59): 118.346,1.1 122.887,1.1 141.225,1.1 141.4,1.262 141.4,4.338 141.225,4.5 116.775,4.5 116.6,4.338 116.6,3.448 116.6,1.262 116.775,1.1
V12 on Bottom Layer "Bottom Layer-GND" (solid, pour order 60): 71.134,1.2 76.682,1.2 99.087,1.2 99.3,1.367 99.3,4.533 99.087,4.7 69.213,4.7 69,4.533 69,3.617 69,1.367 69.213,1.2
V12 on Bottom Layer "Bottom Layer-GND" (solid, pour order 52): 36.1,10.8 36.3,11 40,11 40.7,11 41.3,11 41.5,10.8 41.5,8 41.3,7.8 37.2,7.8 36.8,7.8 36.3,7.8 36.1,8
NetC114_1 on Bottom Layer "Bottom Layer-GND" (solid, pour order 61): 87.7,178.5 90.4,178.5 90.5,178.4 90.5,176.7 90.5,176.6 91.6,175.5 94.2,175.5 97,175.5 97.1,175.4 97.1,174.6 97,174.5 96,174.5 95.9,174.4 95.8,174.3 95.8,174 95.8,172 95.7,171.9 92.8,171.9 87.9,171.9 87.2,171.9 87.1,172 87.1,174 87.1,175.5 87.1,175.7 87.6,176.2 87.6,178.4
NetD54_2 on Bottom Layer "Bottom Layer-GND" (solid, remove dead copper, pour order 41): 153.002,13.5 156.882,13.5 157.188,13.5 157.291,13.6 157.291,15 157.291,18.3 157.393,18.4 158.107,18.4 162.498,18.4 162.6,18.5 162.6,29.3 162.6,29.4 162.498,29.5 153.002,29.5 152.9,29.4 152.9,27.8 152.9,13.6 153.002,13.5
PWR-IN on Bottom Layer "Bottom Layer-GND" (solid, pour order 49): 150.1,66.2 150.2,66.3 151.8,66.3 155.8,66.3 155.9,66.2 155.9,63.7 155.9,61.7 155.9,49.7 155.8,49.6 151.9,49.6 151.9,46.6 151.8,46.5 148.4,46.5 142.5,46.5 142.4,46.6 142.4,52.5 142.4,61 142.5,61.1 149.1,61.1 150,61.1 150.1,61.2
NetC40_1 on Bottom Layer "Bottom Layer-GND" (solid, pour order 50): 149.9,61.9 149.9,61.5 149.9,61.4 149.8,61.3 148.5,61.3 144.7,61.3 144.6,61.4 144.6,63 144.6,70.5 144.6,71.6 144.7,71.7 147.3,71.7 152.8,71.7 153.7,71.7 153.8,71.6 153.8,66.6 153.7,66.5 150,66.5 149.9,66.4 149.9,63.8 149.9,61.4
NetC40_1 on Bottom Layer "Bottom Layer-GND" (solid, pour order 53): 153.7,71.7 155.8,71.7 155.9,71.7 156,71.6 156,70.3 156,69 155.9,68.9 153.5,68.9
NetC27_1 on Bottom Layer "Bottom Layer-GND" (solid, pour order 57): 145.4,77.9 144.7,77.9 144.6,77.8 144.6,76.7 144.6,72 144.7,71.9 155.9,71.9 156,72 156,73.1 156,81.9 156,82.7 155.9,82.8 147.9,82.8 147.8,82.7 147.8,79.5 147.9,79.4 151,79.4 151.1,79.3 151.1,78.4 151.1,78 151,77.9
NetD11_1 on Bottom Layer "Bottom Layer-GND" (solid, pour order 64): 144.287,65 144.4,65.1 144.4,76.7 144.287,76.8 143.27,76.8 138.413,76.8 138.3,76.7 138.3,65.1 138.413,65
V12-MP on Bottom Layer "Bottom Layer-GND" (solid, pour order 65): 143.2,78.1 147.5,78.1 147.6,78.2 147.6,78.9 147.6,83.2 147.5,83.3 146.3,83.3 137.7,83.3 134.9,83.3 134.8,83.2 134.8,82.2 134.8,78.2 134.9,78.1
V12-MP on Bottom Layer "Bottom Layer-GND" (solid, pour order 67): 134.8,83.2 134.8,90.308 134.9,90.4 139.9,90.4 140,90.308 140,83.385 140.1,83.292 140.1,83.2
GND on Bottom Layer "Bottom Layer-GND" (solid, remove dead copper, pour order 55): 0,0 1.016,0 1.8,0 4.9,0 163.9,0 163.9,187.9 -0.2,187.9 -0.2,0.2 0,0
AGND on Top Layer "Bottom Layer-GND" (solid, remove dead copper, pour order 79): 89.5,141.4 90.8,141.4 111.9,141.4 112.2,141.7 112.2,143 112.2,144.6 112.2,153.7 111.9,154 89.2,154 88.9,153.7 88.9,141.7 89.2,141.4
CELLULAR-PWR on Top Layer "Bottom Layer-GND" (solid, remove dead copper, pour order 78): 126.6,123.3 126.6,127.7 126.6,128.6 126.9,128.9 136.4,128.9 136.7,128.6 136.7,123.3
V5 on Top Layer "Bottom Layer-GND" (solid, remove dead copper, pour order 77): 153.5,130 157.2,130 157.4,130.2 157.4,133.8 156,135.2 156,141.4 155.7,141.7 146,141.7 145.7,141.4 145.7,138.6 146,138.3 150.1,138.3 150.4,138 150.4,135.1 150.7,134.8 151.1,134.4 151.1,133.6 151.1,130.3 151.4,130
V3.3 on Top Layer "Bottom Layer-GND" (solid, remove dead copper, pour order 76): 152.8,113.6 157,113.6 157.3,113.9 157.3,118.8 157,119.1 156.2,119.1 155.9,119.4 155.9,122 155.9,124.8 155.6,125.1 147.9,125.1 147.6,124.8 147.6,123.5 147.4,123.3 145.7,123.3 145.5,123.1 145.5,122.4 145.5,122.3 145.7,122.1 147.2,122.1 150.4,122.1 150.7,121.8 150.7,118.6 151.2,118.1 151.2,117.4 151.2,113.9 151.5,113.6
CELLULAR-PWR on Top Layer "Bottom Layer-GND" (solid, remove dead copper, pour order 75): 132,113.5 137,113.5 137.1,113.5 137.4,113.8 137.4,117.5 136.7,118.2 136.7,123.3 136.4,123.6 126.9,123.6 126.6,123.3 126.6,122.5 126.9,122.2 128.9,122.2 129.2,121.9 129.2,118.4 129.5,118.1 130.9,118.1 131.2,117.8 131.2,113.8 131.5,113.5
V12 on Top Layer "Bottom Layer-GND" (solid, pour order 74): 142.7,107.2 142.7,104.7 142.4,104.4 139.4,104.4 135.3,104.4 135,104.1 135,103.3 134.7,103 133.4,103 133.4,107.2
V3.3-MCU on Top Layer "Bottom Layer-GND" (solid, remove dead copper, pour order 73): 149.2,102.1 152,102.1 152.2,101.9 152.5,101.6 152.5,101.3 152.5,101.2 152.7,101 159.6,101 159.9,101.3 159.9,105.1 159.9,106.2 159.6,106.5 156.7,106.5 152.9,106.5 152.7,106.5 152,105.8 152,104.3 152,104.2 151.7,103.9 148.9,103.9 148.7,103.7 148.7,102.3 148.9,102.1
NetC24_1 on Top Layer "Bottom Layer-GND" (solid, pour order 66): 147.6,131.9 148,131.9 148.1,131.8 148.1,130.5 148.1,129.8 148.2,129.7 155.3,129.7 157.3,129.7 157.4,129.6 157.4,125.5 157.3,125.4 151.9,125.4 147.7,125.4 147.6,125.5 147.6,131.9
NetJ7_9 on Top Layer "Bottom Layer-GND" (solid, pour order 56): 40.5,1.5 49,1.5 59.5,1.5 60.7,1.5 60.9,1.7 60.9,4.4 60.9,4.9 60.9,7 60.7,7.2 39.5,7.2 39.3,7 39.3,1.7 39.5,1.5
V5 on Top Layer "Bottom Layer-GND" (solid, pour order 47): 65,44.3 68.6,44.3 68.8,44.1 68.8,41.3 68.8,40.1 68.6,39.9 64.9,39.9 64.7,40.1 64.7,44.1 64.9,44.3
V5 on Top Layer "Bottom Layer-GND" (solid, pour order 44): 1.1,68.6 1.1,72.4 1.3,72.6 5.2,72.6 6.7,72.6 6.9,72.4 6.9,68.7 6.7,68.5 6.6,68.4 1.3,68.4
NetJ6_5 on Top Layer "Bottom Layer-GND" (solid, pour order 62): 75.5,182.067 75.5,182.333 75.601,182.4 75.904,182.4 93.599,182.4 93.7,182.333 93.7,178.267 93.599,178.2 90.262,178.2 89.453,178.733 80.657,178.733 79.848,178.2 75.601,178.2 75.5,178.267
NetC1_2 on Top Layer "Bottom Layer-GND" (solid, remove dead copper, pour order 43): 144.483,36 146.474,36 147.469,35 147.469,32.6 147.569,32.5 147.967,32.5 154.835,32.5 154.935,32.6 154.935,34.4 154.935,35.9 155.034,36 159.513,36 159.812,36 159.912,35.9 159.912,35.5 159.912,26.4 160.011,26.3 161.902,26.3 162.3,26.3 162.4,26.2 162.4,25.3 162.4,23.5 162.3,23.4 160.011,23.4 159.912,23.3 159.912,23 159.912,19.1 159.812,19 158.219,19 140.9,19 140.8,19.1 140.8,21.3 140.8,34.4 140.8,34.5 140.9,34.6 143.288,34.6 143.388,34.7 143.388,35
NetC1_2 on Top Layer "Bottom Layer-GND" (solid, pour order 45): 143.4,35 140.9,35 140.8,34.9 140.8,34.1 140.9,34 143.4,34
PWR-IN on Top Layer "Bottom Layer-GND" (solid, pour order 46): 144.8,37.5 146.2,37.5 147.9,39.106 149.7,40.807 151,40.807 151.1,40.902 151.1,42.981 151.1,59.706 151,59.8 142.5,59.8 142.4,59.706 142.4,39.484 144.5,37.5 144.8,37.5
NetC40_1 on Top Layer "Bottom Layer-GND" (solid, pour order 54): 154.819,64.2 156.371,64.2 156.5,64.309 156.5,64.526 156.5,71.591 156.371,71.7 155.724,71.7 149.129,71.7 149,71.591 149,64.309 149.129,64.2
NetC27_1 on Top Layer "Bottom Layer-GND" (solid, pour order 58): 149.259,78.4 155.724,78.4 156.241,78.4 156.371,78.4 156.5,78.295 156.5,76.932 156.5,72.005 156.371,71.9 154.043,71.9 149.129,71.9 149,72.005 149,76.198 149,78.295 149.129,78.4
NetC27_1 on Top Layer "Bottom Layer-GND" (solid, pour order 63): 150.75,82 150.85,82.1 153.75,82.1 153.85,82 153.85,79.4 153.85,78.8 153.75,78.7 150.85,78.7 150.75,78.8
NetC36_1 on Top Layer "Bottom Layer-GND" (solid, pour order 68): 127.8,115.8 128,115.8 128.1,115.7 128.1,113.7 128.6,113.2 130.2,113.2 137.3,113.2 137.4,113.1 137.4,109.3 137.3,109.2 136.6,109.2 133.6,109.2 127.8,109.2 127.7,109.3 127.7,113.5 127.7,115.7
V12 on Top Layer "Bottom Layer-GND" (solid, pour order 69): 127.1,115.8 127.4,115.8 127.5,115.7 127.5,113.7 127.5,112.1 127.5,112 127.5,109.2 127.7,109 128,109 137.4,109 137.6,109.2 137.6,114 146.8,114 146.9,114.1 146.9,115.7 147,115.8 147.3,115.8 147.4,115.7 147.4,114.3 147.4,110.1 147.3,110 144.6,110 142.8,110 142.7,109.9 142.7,107.2 142.6,107.1 142.3,107.1 142.1,107.1 137.7,107.1 136.1,107.1 133.9,104.9 133.9,104.1 133.9,103.2 133.7,103 132.2,103 123.8,103 123.7,103.1 123.7,105.2 123.7,109.3 123.7,113.7 123.8,113.8 126.9,113.8 127,113.9 127,115.7
NetC14_1 on Top Layer "Bottom Layer-GND" (solid, pour order 70): 147.7,115.8 147.9,115.8 148,115.8 148.1,115.7 148.1,114.5 148.1,114.1 148.9,113.3 157,113.3 157.2,113.3 157.3,113.2 157.3,109.1 157.2,109 147.7,109 147.6,109.1 147.6,115.7 147.7,115.8
V12 on Top Layer "Bottom Layer-GND" (solid, pour order 71): 137.6,114 137.6,116.5 137.7,116.6 139,116.6 140.3,116.6 140.4,116.7 140.4,117.3 140.4,118.2 140.4,125 140.4,125.4 140.5,125.5 142.9,125.5 144.2,125.5 144.3,125.6 144.3,130 144.4,130.1 146.8,130.1 146.9,130.2 146.9,131.9 147,132 147.3,132 147.4,131.9 147.4,130.2 147.4,123.6 147.3,123.5 146.5,123.5 144,123.5 143.9,123.4 143.9,118.5 143.9,113.9 142.5,113.9 137.7,113.9 137.6,114
NetC1_1 on Top Layer "Bottom Layer-GND" (solid, pour order 72): 156.4,38.4 160,38.4 160.2,38.6 160.2,40.4 160.2,43.3 160,43.5 156.2,43.5 156,43.3 156,40 156,38.6 156.2,38.4
V12-MP on Top Layer "Bottom Layer-GND" (solid, remove dead copper, pour order 42): 147.6,81.2 147.6,83.2 147.5,83.3 146.7,83.3 141.2,83.3 141.1,83.4 141.1,90.2 141,90.3 134.9,90.3 134.8,90.2 134.8,67.2 135,67 141.2,67 141.4,67.2 141.4,68.4 141.4,69.1 141.4,77.9 141.6,78.1 147.5,78.1 147.6,78.2
V12-MP on Top Layer "Bottom Layer-GND" (solid, remove dead copper, pour order 48): 127,101.3 130.7,101.3 130.9,101.1 130.9,97.7 130.9,97.5 131.1,97.3 136,97.3 136.3,97 136.3,95.6 136.6,95.3 139.5,95.3 139.8,95.6 139.8,97 140.1,97.3 143.7,97.3 144,97.6 144,101.5 144.3,101.8 151.7,101.8 152.1,101.4 152.1,100.1 152.1,93.2 151.8,92.9 147.2,92.9 141.4,92.9 141.1,92.6 141.1,90.2 126.8,90.2 126.5,90.5 126.5,101 126.8,101.3
GND on Top Layer "Bottom Layer-GND" (solid, remove dead copper, pour order 51): 0,0 3.3,0 163.8,0 163.8,187.8 0.1,187.8 -0.1,187.8 -0.1,0.1 0,0
AGND on GND (split plane): 121.871,148.129 112.4,148.129 112.35,148.12 112.308,148.092 112.28,148.05 112.271,148 112.271,141.629 89.529,141.629 89.529,153.871 117.5,153.871 117.55,153.88 117.592,153.908 117.62,153.95 117.629,154 117.629,171 117.62,171.05 117.592,171.092 117.55,171.12 117.5,171.129 99.5,171.129 99.45,171.12 99.408,171.092 99.38,171.05 99.371,171 99.371,165.129 95.429,165.129 95.429,174.871 121.871,174.871
NetC1_1 on GND (split plane): 163.32,29.629 157.5,29.629 157.45,29.62 157.408,29.592 157.38,29.55 157.371,29.5 157.371,14 157.371,8.029 148.729,8.029 148.729,35.871 153.5,35.871 153.55,35.88 153.592,35.908 153.62,35.95 153.629,36 153.629,43.371 163.32,43.371
GND on GND (split plane): 163.32,43.629 153.5,43.629 153.45,43.62 153.408,43.592 153.38,43.55 153.371,43.5 153.371,36.129 148.6,36.129 148.55,36.12 148.508,36.092 148.48,36.05 148.471,36 148.471,7.9 148.48,7.85 148.508,7.808 148.55,7.78 148.6,7.771 157.5,7.771 157.55,7.78 157.592,7.808 157.62,7.85 157.629,7.9 157.629,14 157.629,29.371 163.32,29.371 163.32,0.51 0.51,0.51 0.51,187.297 163.32,187.297
V3.3-MCU on POWER (split plane): 163.32,94.629 147.629,94.629 147.629,109.071 159.5,109.071 159.55,109.08 159.592,109.108 159.62,109.15 159.629,109.2 159.629,145.5 159.62,145.55 159.592,145.592 159.55,145.62 159.5,145.629 132.629,145.629 132.629,181 132.62,181.05 132.592,181.092 132.55,181.12 132.5,181.129 98.129,181.129 98.129,187.297 163.32,187.297
CELLULAR-PWR on POWER (split plane): 87.371,129 87.38,128.95 87.408,128.908 87.45,128.88 87.5,128.871 135.371,128.871 135.371,123.629 81.629,123.629 81.629,171.371 87.371,171.371
V12 on POWER (split plane): 147.371,94.5 147.38,94.45 147.408,94.408 147.45,94.38 147.5,94.371 163.32,94.371 163.32,0.51 35.629,0.51 35.629,10.871 139.5,10.871 139.55,10.88 139.592,10.908 139.62,10.95 139.629,11 139.629,65.9 139.62,65.95 139.592,65.992 139.55,66.02 139.5,66.029 123.129,66.029 123.129,109.071 147.371,109.071
V5 on POWER (split plane): 97.871,181 97.88,180.95 97.908,180.908 97.95,180.88 98,180.871 132.371,180.871 132.371,145.5 132.38,145.45 132.408,145.408 132.45,145.38 132.5,145.371 159.371,145.371 159.371,131.629 144.654,131.629 137.492,138.792 137.45,138.82 137.4,138.829 117.629,138.829 117.629,171.5 117.62,171.55 117.592,171.592 117.55,171.62 117.5,171.629 13.1,171.629 13.05,171.62 13.008,171.592 12.98,171.55 12.971,171.5 12.971,50 12.98,49.95 13.008,49.908 13.05,49.88 13.1,49.871 87.6,49.871 87.65,49.88 87.692,49.908 87.72,49.95 87.729,50 87.729,57.171 97.571,57.171 97.571,50 97.58,49.95 97.608,49.908 97.65,49.88 97.7,49.871 107.671,49.871 107.671,18.629 100.629,18.629 100.629,46.5 100.62,46.55 100.592,46.592 100.55,46.62 100.5,46.629 69.5,46.629 69.45,46.62 69.408,46.592 69.38,46.55 69.371,46.5 69.371,38.129 41.5,38.129 41.45,38.12 41.408,38.092 41.38,38.05 41.371,38 41.371,25.129 21.129,25.129 21.129,39.5 21.12,39.55 21.092,39.592 21.05,39.62 21,39.629 0.51,39.629 0.51,187.297 97.871,187.297
V3.3 on POWER (split plane): 117.371,138.7 117.38,138.65 117.408,138.608 117.45,138.58 117.5,138.571 137.346,138.571 144.508,131.408 144.55,131.38 144.6,131.371 159.371,131.371 159.371,109.329 123,109.329 122.95,109.32 122.908,109.292 122.88,109.25 122.871,109.2 122.871,65.9 122.88,65.85 122.908,65.808 122.95,65.78 123,65.771 139.371,65.771 139.371,11.129 35.5,11.129 35.45,11.12 35.408,11.092 35.38,11.05 35.371,11 35.371,0.51 0.51,0.51 0.51,39.371 20.871,39.371 20.871,25 20.88,24.95 20.908,24.908 20.95,24.88 21,24.871 41.5,24.871 41.55,24.88 41.592,24.908 41.62,24.95 41.629,25 41.629,37.871 69.5,37.871 69.55,37.88 69.592,37.908 69.62,37.95 69.629,38 69.629,46.371 100.371,46.371 100.371,18.5 100.38,18.45 100.408,18.408 100.45,18.38 100.5,18.371 107.8,18.371 107.85,18.38 107.892,18.408 107.92,18.45 107.929,18.5 107.929,50 107.92,50.05 107.892,50.092 107.85,50.12 107.8,50.129 97.829,50.129 97.829,57.3 97.82,57.35 97.792,57.392 97.75,57.42 97.7,57.429 87.6,57.429 87.55,57.42 87.508,57.392 87.48,57.35 87.471,57.3 87.471,50.129 13.229,50.129 13.229,171.371 81.371,171.371 81.371,123.5 81.38,123.45 81.408,123.408 81.45,123.38 81.5,123.371 135.5,123.371 135.55,123.38 135.592,123.408 135.62,123.45 135.629,123.5 135.629,129 135.62,129.05 135.592,129.092 135.55,129.12 135.5,129.129 87.629,129.129 87.629,171.371 117.371,171.371

## Keep-outs
Top Layer:
  lines w0.05: 132,66.2 132.7,66.2 135.3,66.2 138.5,66.2 138.8,65.9 138.8,63.1 140.3,61.6 159.1,61.6 161.6,64.1 162.1,64.6 162.1,85.9 160.9,87.1 159.9,87.1 159.9,87.4 158.9,87.4 158.9,86.2 159.9,86.2 159.9,86.5 160.7,86.5 160.9,86.3 161.5,85.7 161.5,64.8 158.9,62.2 140.5,62.2 139.4,63.3 139.4,66.1 138.7,66.8 135.3,66.8 132.7,66.8 132,66.8 132,66.2
Keep-Out Layer:
  lines w0.127: 0,1.016 ccw(c1.016,1.016) 1.016,0 162.814,0 ccw(c162.814,1.016) 163.83,1.016 163.83,186.792 ccw(c162.814,186.792) 162.814,187.808 1.016,187.808 ccw(c1.016,186.792) 0,186.792 0,1.016 ; 14.478,57.252 14.478,119.609 53.34,119.609 53.34,57.252 14.478,57.252

## Other copper
Top Layer:
  rectangle net GND: 64.5,154.95 65.5,155.2
  rectangle net GND: 64.5,154.6 64.8,155.5
  rectangle net GND: 65.4,161.47 68.008,161.8
GND (plane layer: these items are gaps in the copper):
  lines w0.254: 98,141.5 89.4,141.5 ; 163.83,29.5 157.5,29.5 157.5,14 157.5,7.9 148.6,7.9 148.6,36 153.5,36 153.5,43.5 163.83,43.5 ; 89.4,141.5 112.4,141.5 112.4,148 122,148 122,175 95.3,175 95.3,165 99.5,165 99.5,171 117.5,171 117.5,154 98,154 89.4,154 89.4,141.5
POWER (plane layer: these items are gaps in the copper):
  lines w0.254: 0,39.5 21,39.5 21,25 41.5,25 41.5,38 69.5,38 69.5,46.5 97.7,46.5 ; 13.229,171.5 81.5,171.5 ; 13.4,171.5 13.1,171.5 13.1,50 69.5,50 87.6,50 87.6,57.3 97.7,57.3 97.7,50 107.8,50 107.8,18.5 100.5,18.5 100.5,46.5 97.6,46.5 ; 35.5,0.3 35.5,11 123,11 ; 87.5,171.5 87.5,129 135.5,129 135.5,123.5 81.5,123.5 81.5,171.5 ; 98,187.708 98,181 129,181 132.5,181 132.5,145.5 159.5,145.5 159.5,109.2 147.5,109.2 ; 122.6,11 139.5,11 139.5,65.9 123,65.9 123,109.2 125.3,109.2 147.5,109.2 ; 159.5,131.5 150.5,131.5 144.6,131.5 137.4,138.7 122.5,138.7 117.5,138.7 117.5,171.5 81.5,171.5 ; 163.4,94.5 147.5,94.5 147.5,109.2

## Silkscreen, mask and mechanical layers (free items; w line width, h text height)
Top Overlay:
  lines w0.2: 125.6,118.6 125.8,118.8 ; 126,118.6 125.8,118.8 ; 144.3,118 145,118 145.8,118.8 ; 144.7,133.8 145.7,134.8 ; 145.4,134.8 145.7,134.8 ; 145.5,118.8 145.8,118.8 ; 145.7,134.5 145.7,134.8 ; 145.8,118.5 145.8,118.8 ; 125,117.7 125.5,117.7 125.8,118 125.8,118.8 ; 125,117.7 125,117.7 ; 125.8,118.8 125.8,118.8
  text "PJ1301-001-A1" at 109.7,176.3 h3

## Text inside footprints (layer, text, board x,y; h text height)
D13: Top Overlay "+" at 143.854,180.661 h0.8
D14: Top Overlay "+" at 139.091,180.661 h0.8
D15: Top Overlay "+" at 134.329,180.661 h0.8
D16: Top Overlay "+" at 129.566,180.661 h0.8
D17: Top Overlay "+" at 115.278,180.661 h0.8
D18: Top Overlay "+" at 110.516,180.661 h0.8
D19: Top Overlay "+" at 148.616,180.661 h0.8
D20: Top Overlay "+" at 120.041,180.661 h0.8
D21: Top Overlay "+" at 124.803,180.661 h0.8
J4: Top Overlay "2" at 130.5,62.9 h0.8 r270; Top Overlay "1" at 127.992,62.932 h0.8 r270; Top Overlay "9" at 127.992,49.216 h0.8 r270; Top Overlay "10" at 130.532,49.216 h0.8 r270
M1: Top Overlay "A1" at 2.5,134.7 h0.8 r90; Top Overlay "A2" at 4.6,134.7 h0.8 r90; Top Overlay "C1" at 71.7,50.2 h0.8 r90; Top Overlay "C2" at 69.7,50.2 h0.8 r90; Top Overlay "B1" at 71.7,88.7 h0.8 r90; Top Overlay "B2" at 69.8,88.7 h0.8 r90